# Altium PCB display.PcbDoc (part 1 of 2)
Units mil, origin at the board's own origin, x right, y up, seen from the top; angles counter-clockwise.
Board outline 6000 x 4000 mil, 2 copper layers (Top Layer, Bottom Layer); 69 components, 74 nets, 310 pads, 139 vias.
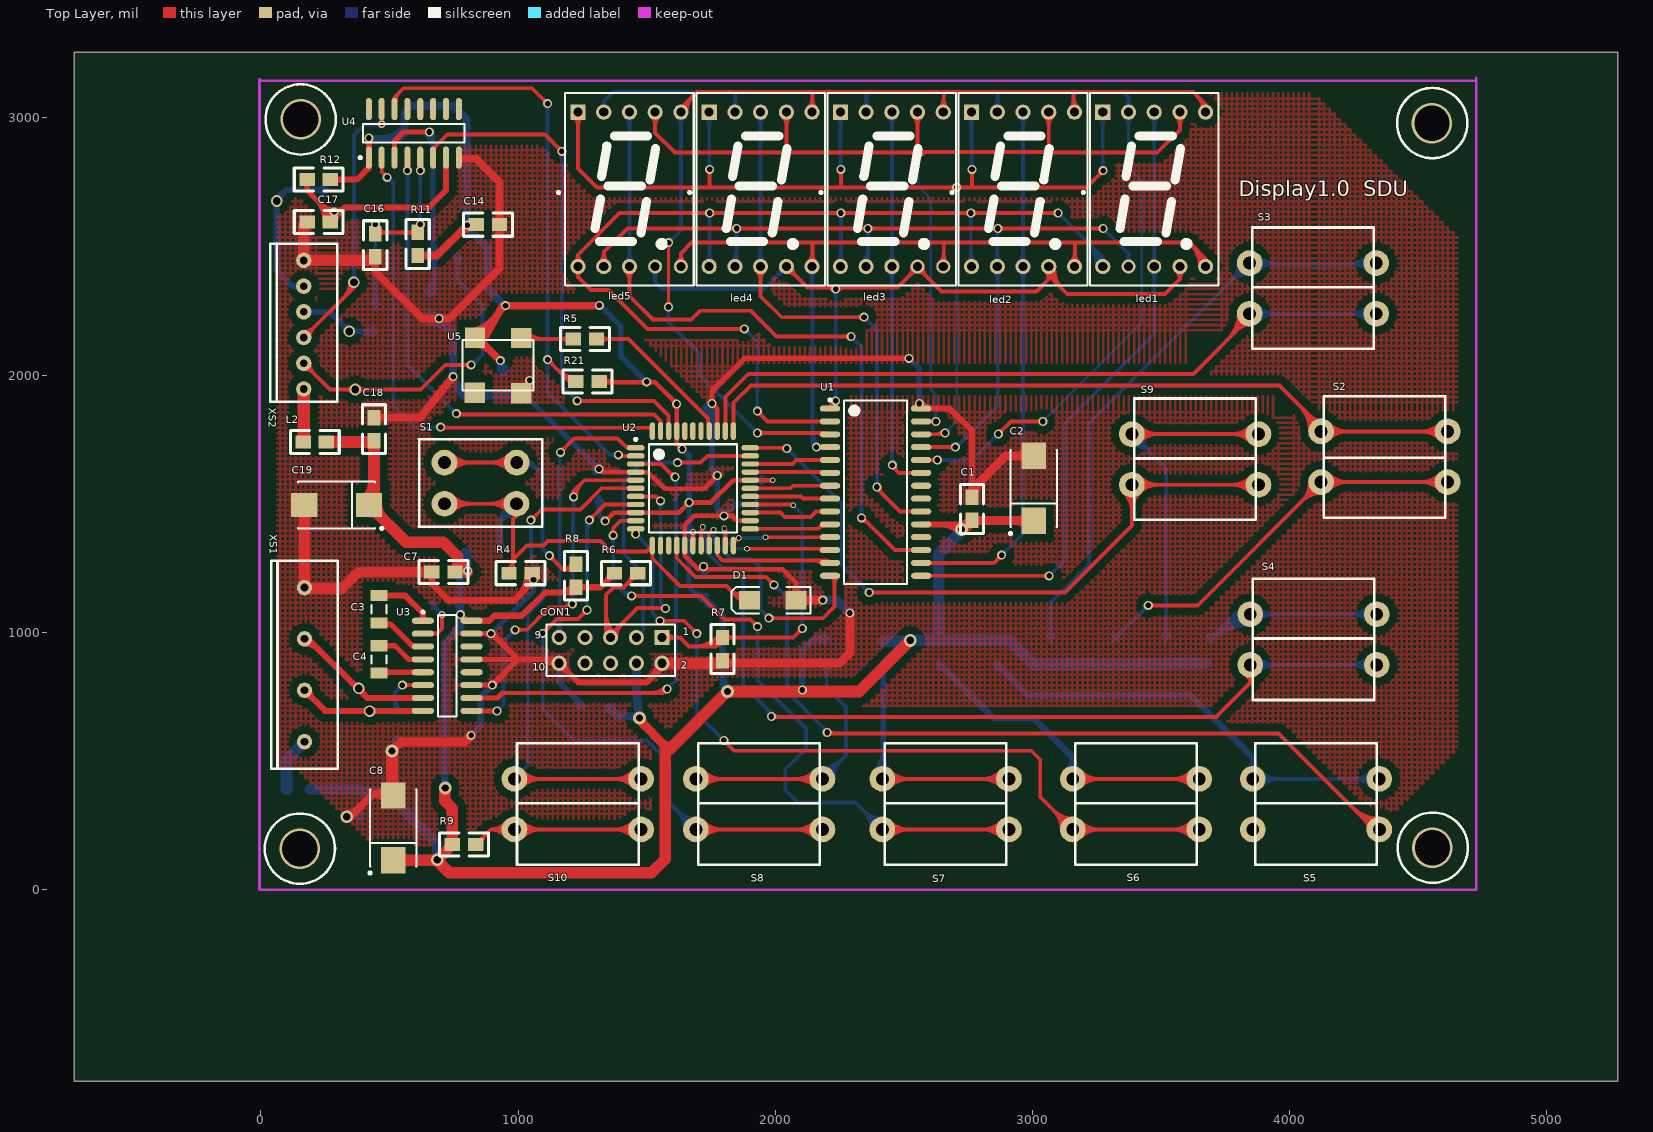
[diagram p0: Top Layer view]
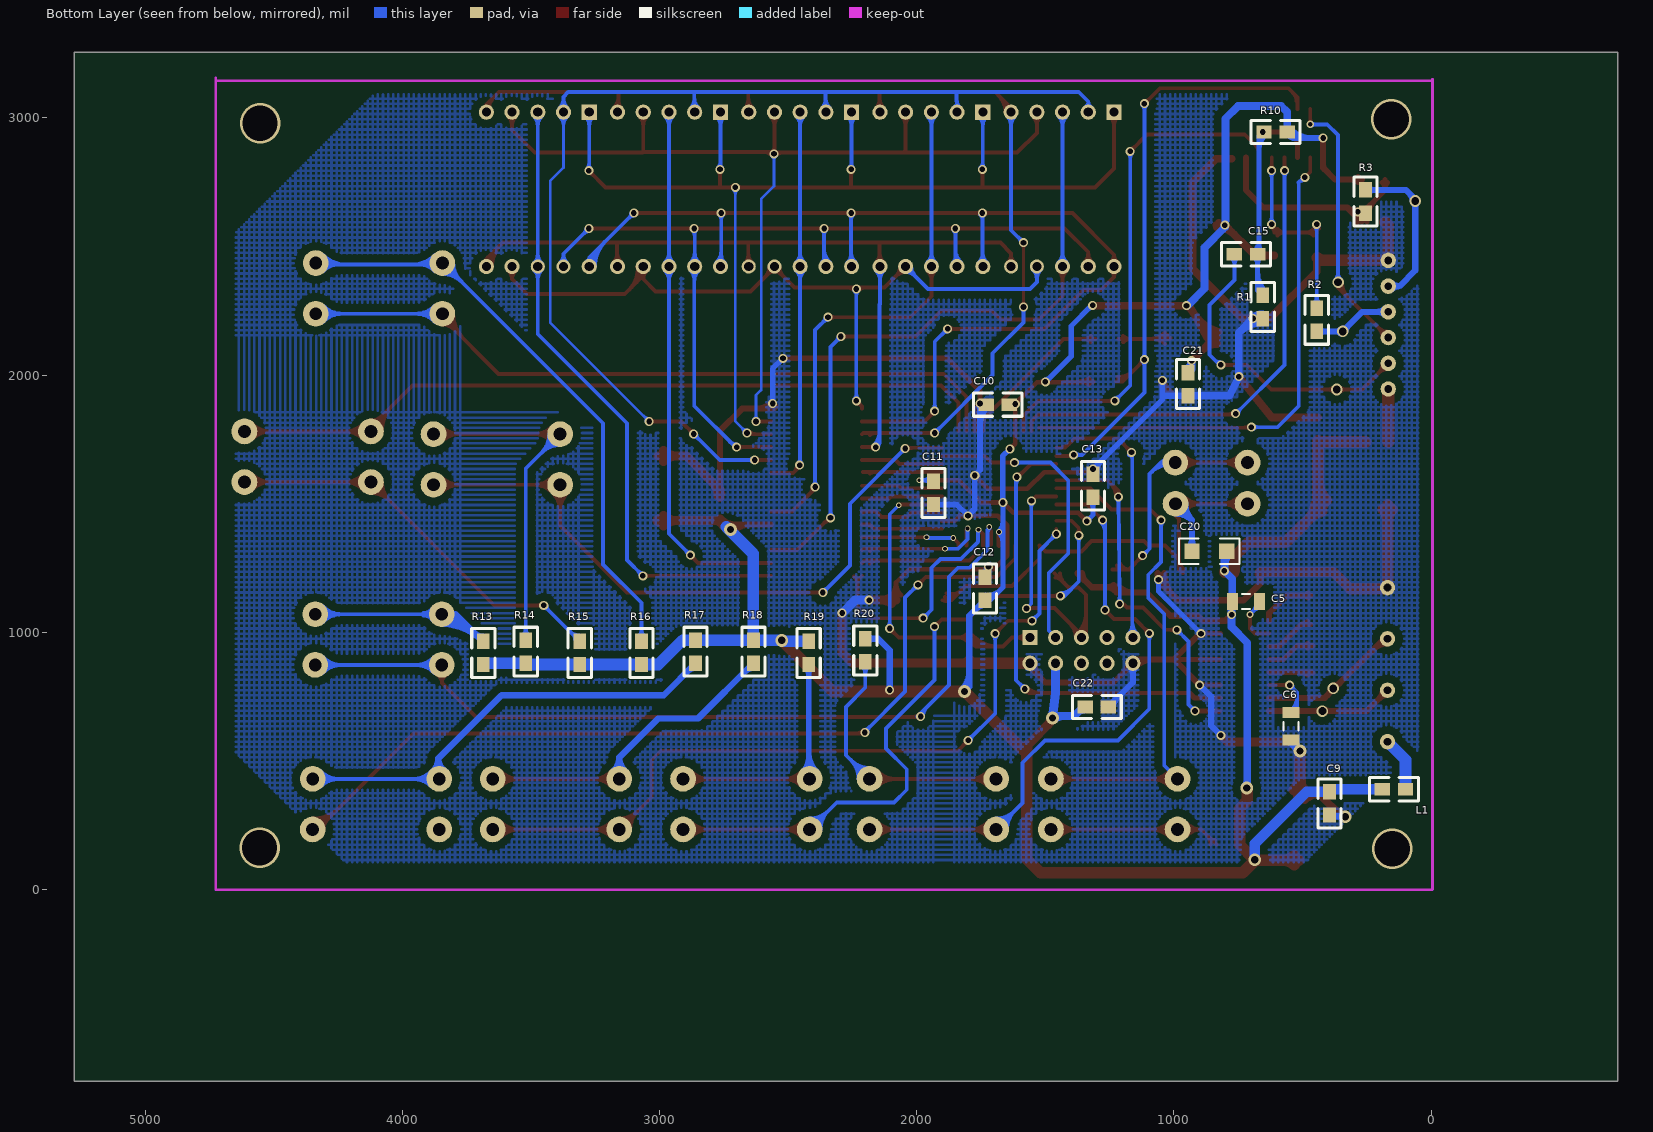
[diagram p1: Bottom Layer view, seen from below]

## Layer stack, top to bottom
Top Layer: signal copper 1.4
Dielectric: dielectric 12.6, FR-4, Dk 4.8
Bottom Layer: signal copper 1.4

## Board outline
-725,-745 5275,-745 5275,3255 -725,3255

## Design rules (kind name [scope] priority, off if disabled: settings)
Clearance [All] p1: gap=10
ComponentClearance [All] p1 off: gap=10 collisioncheckmode=3 verticalgap=10 showdistances=FALSE
Height [All] p1 off: minheight=0 maxheight=1000 prefheight=500
PlaneClearance [All] p1: clearance=40
PlaneConnect [All] p1: planeconnectstyle=Direct reliefexpansion=20 reliefentries=4 reliefconductorwidth=10 reliefairgap=10
PolygonConnect [All] p1: connectstyle=Direct reliefconductorwidth=10 reliefentries=4 polygonreliefangle="90 Angle"
RoutingVias [All] p1: holewidth=22 width=35 viastyle="Through Hole" minholewidth=22 minwidth=35 maxholewidth=22 maxwidth=35
SilkscreenOverComponentPads [IsPad] p1: minsilkscreentomaskgap=10
SolderMaskExpansion [All] p1: expansion=4
Width [All] p1: maxlimit=50 minlimit=10 preferedwidth=15
23 further rules are at their usual default settings.

## Components (designator, comment, footprint, x,y, rotation, side; value= is the part's Value field where it differs from the comment)
C1 "Cap" 0805 2765,1525 r270 top
C2 "22uF" 7343 3005,1560 r90 top
C3 "10uF" C1206 460,1090 r270 top
C4 "22uF" C1206 460,895 r270 top
C5 "10uF" C1206 720,1120 r180 bottom
C6 "10uF" C1206 545,635 r90 bottom
C7 "Cap" 0805 665,1235 r0 top
C8 "22uF" 7343 515,240 r90 top
C9 "Cap" 0805 395,290 r90 bottom
C10 "Cap" 0805 1730,1885 r180 bottom
C11 "Cap" 0805 1935,1497.01 r90 bottom
C12 "Cap" 0805 1735,1215 r270 bottom
C13 "Cap" 0805 1315,1615 r270 bottom
C14 "Cap" 0805 928,2585 r180 top
C15 "Cap" 0805 655,2220 r90 bottom
C16 "Cap" 0805 445,2460 r90 top
C17 "Cap" 0805 180,2595 r0 top
C18 "Cap" 0805 440,1835 r270 top
C19 "22uF" 7343 295,1495 r180 top
C20 "Cap" 1206 795,1315 r0 bottom
C21 "Cap" 0805 945,1920 r90 bottom
C22 "Cap" 0805 1255,710 r0 bottom
CON1 "jtag" HDR2X5 1560,980 r180 top
D1 "LL4148" DO214 1990,1125 r180 top
L1 "ferrite bead" 0805 190,390 r180 bottom
L2 "ferrite bead" 0805 255,1740 r180 top
led1 "8seg 10pin" LEDsum#1 3420,2545 r0 top
led2 "8seg 10pin" LEDsum#2 2910,2545 r0 top
led3 "8seg 10pin" LEDsum#3 2400,2545 r0 top
led4 "8seg 10pin" LEDsum#2 1890,2545 r0 top
led5 "8seg 10pin" LEDsum#3 1380,2545 r0 top
R1 "300R" 0805 675,2470 r0 bottom
R2 "300R" 0805 445,2260 r270 bottom
R3 "300R" 0805 255,2630 r90 bottom
R4 "10k" 0805 1055,1230 r180 top
R5 "22R" 0805 1305,2140 r180 top
R6 "4.7k" 0805 1375,1230 r0 top
R7 "1k" 0805 1795,980 r270 top
R8 "1k" 0805 1225,1265 r270 top
R9 "10k" 0805 745,175 r0 top
R10 "10K(beiyong)" 0805 650,2945 r180 bottom
R11 "10K" 0805 610,2555 r270 top
R12 "10K" 0805 180,2760 r0 top
R13 "10K" 0805 3685,965 r270 bottom
R14 "10K" 0805 3520,970 r270 bottom
R15 "10K" 0805 3310,965 r270 bottom
R16 "10K" 0805 3070,965 r270 bottom
R17 "10K" 0805 2860,880 r90 bottom
R18 "10K" 0805 2635,880 r90 bottom
R19 "10K" 0805 2420,875 r90 bottom
R20 "10K" 0805 2200,885 r90 bottom
R21 "10K(beiyong)" 0805 1225,1975 r0 top
S1 "SW-PB" reset 995,1500 r90 top
S2 "SW-PB" B3F4050 4535,1860 r270 top
S3 "SW-PB" B3F4050 3923,2160 r90 top
S4 "SW-PB" B3F4050 3925,795 r90 top
S5 "SW-PB" B3F4050 3935,155 r90 top
S6 "SW-PB" B3F4050 3235,155 r90 top
S7 "SW-PB" B3F4050 2495,155 r90 top
S8 "SW-PB" B3F4050 1770,155 r90 top
S9 "SW-PB" B3F4050 3465,1495 r90 top
S10 "SW-PB" B3F4050 1065,155 r90 top
U1 "ICM7228AIBIZ" SO28_L 2390,1545 r0 top
U2 "EPM7064AETC44-10" TQFP44_N 1680,1560 r0 top
U3 "MAX232ESE" NSO16_N 725,870 r0 top
U4 "cd4049UBD" L16_N 595,2940 r90 top
U5 "有源晶振" smd7050 1060,1940 r90 top
XS1 "CON4" 2SIP4 170,575 r90 top
XS2 "xs2" SIP6 90,2100 r90 top

## Footprints (in the part's own frame and the unit in brackets; to place one, negate y for a bottom-side part, rotate by r counter-clockwise, add the part's x,y. Pads: shape width x height; smd on the part's side, far side on the other; paste and mask are expansions set on the pad)
2SIP4 [mil]
  round 60 hole 30: 1(0,0) 2(200,0) 3(400,0) 4(599,0)
  silkscreen extent -105,-130 704,130
0805 [mil]
  rect 60x50 smd: 1(0,0) 2(90,0)
  silkscreen extent -50,-45 140,45
1206 [mil]
  rect 60x60 smd: 1(0,0) 2(135,0)
  silkscreen extent -50,-50 185,50
7343 [mm] "Capacitor, SM Tantalum; Body 7.3 x 4.3 mm (LxW typ)"
  rect 2.6x2.4 smd: 1(-3.2,0) 2(3.2,0)
  silkscreen extent -4.57,-2.3 3.8,2.42
B3F4050 [mm]
  round 2.54 hole 1.27: 1(2,2) 1(2,-10.5) 2(7,2) 2(7,-10.497)
  silkscreen extent -1.47,-10.25 10.52,1.75
C1206 [mm] "Chip Capacitor, Body 3.2x1.6mm, IPC High Density"
  rect 1.1x1.7 smd: 1(-1.35,0) 2(1.35,0)
  silkscreen extent -0.4,-0.75 0.4,0.75, body extent -1.7,-0.9 1.7,0.9, height 1.3
DO214 [mm] "DO-214-AC/SMA; 2 C-Bend Leads; Body 5.3 x 2.6 mm, inc. leads (LxW)"
  rect 2.1x1.85 smd: 1(-2.3,0) 2(2.3,0)
  silkscreen extent -3.75,-1.33 4.05,1.33
HDR2X5 [mm] "Connector; Header; 5x2 Position"
  rect 1.5x1.5 hole 0.9: 1(0,0)
  round 1.5 hole 0.9: 2(0,2.54) 3(2.54,0) 4(2.54,2.54) 5(5.08,0) 6(5.08,2.54) 7(7.62,0) 8(7.62,2.54) 9(10.16,0) 10(10.16,2.54)
  silkscreen extent -1.27,-1.27 11.43,3.81
L16_N [mm] "SOIC, 16-Leads, Body 9.9x3.9mm, Pitch 1.27mm, IPC Medium Density"
  oval 2.2x0.6 smd: 1(-2.4,4.445) 2(-2.4,3.175) 3(-2.4,1.905) 4(-2.4,0.635) 5(-2.4,-0.635) 6(-2.4,-1.905) 7(-2.4,-3.175) 8(-2.4,-4.445) 9(2.4,-4.445) 10(2.4,-3.175) 11(2.4,-1.905) 12(2.4,-0.635) 13(2.4,0.635) 14(2.4,1.905) 15(2.4,3.175) 16(2.4,4.445)
  silkscreen extent -2.52,-5 0.9,5.42, body extent -1.95,-4.95 1.95,4.95, height 1.75
LEDsum#1 [mm]
  round 1.5 hole 0.9: a(3.89,12.12) AT(1.35,12.12) b(6.43,12.12) c(3.89,-3.12) DP(6.43,-3.12) e(-3.73,-3.12) f(-1.19,12.12)
  round 1.397 hole 0.9: AT(1.35,-3.12) d(-1.19,-3.12)
  rect 1.5x1.5 hole 0.9: g(-3.73,12.12)
  silkscreen extent -5.77,-5 7.7,14
LEDsum#2 [mm]
  round 1.5 hole 0.9: a(3.89,12.12) AT(1.35,-3.12) AT(1.35,12.12) b(6.43,12.12) c(3.89,-3.12) d(-1.19,-3.12) DP(6.43,-3.12) e(-3.73,-3.12) f(-1.19,12.12)
  rect 1.5x1.5 hole 0.9: g(-3.73,12.12)
  silkscreen extent -5.77,-5 7.7,14
LEDsum#3 [mm]
  round 1.5 hole 0.9: a(3.89,12.12) AT(1.35,-3.12) AT(1.35,12.12) b(6.43,12.12) d(-1.19,-3.12) e(-3.73,-3.12) f(-1.19,12.12)
  round 1.397 hole 0.9: c(3.89,-3.12) DP(6.43,-3.12)
  rect 1.5x1.5 hole 0.9: g(-3.73,12.12)
  silkscreen extent -5.77,-5 7.7,14
NSO16_N [mm] "SOIC, 16-Leads, Body 9.9x3.9mm, Pitch 1.27mm, IPC Medium Density"
  oval 2.2x0.6 smd: 1(-2.4,4.445) 2(-2.4,3.175) 3(-2.4,1.905) 4(-2.4,0.635) 5(-2.4,-0.635) 6(-2.4,-1.905) 7(-2.4,-3.175) 8(-2.4,-4.445) 9(2.4,-4.445) 10(2.4,-3.175) 11(2.4,-1.905) 12(2.4,-0.635) 13(2.4,0.635) 14(2.4,1.905) 15(2.4,3.175) 16(2.4,4.445)
  silkscreen extent -2.52,-5 0.9,5.42, body extent -2,-5 2,5, height 1.75
reset [mil]
  round 100 hole 50: 1(0,281) 1(0,1) 2(160,281) 2(160,0)
  silkscreen extent -90,-100 251,380
SIP6 [mil]
  round 60 hole 30: 1(-154,-77) 2(-54,-77) 3(46,-77) 4(146,-77) 5(246,-77) 6(346,-77)
  silkscreen extent -204,-207 410,53
smd7050 [mil]
  rect 78.74x78.74 smd: 1(-9,228) 2(-10,47) 3(204,47) 4(205,227)
  silkscreen extent 0,0 197,276
SO28_L [mm] "SOIC, 28-Leads, Body 17.9x7.5mm, Pitch 1.27mm, IPC High Density"
  oval 2x0.6 smd: 1(-4.5,8.255) 2(-4.5,6.985) 3(-4.5,5.715) 4(-4.5,4.445) 5(-4.5,3.175) 6(-4.5,1.905) 7(-4.5,0.635) 8(-4.5,-0.635) 9(-4.5,-1.905) 10(-4.5,-3.175) 11(-4.5,-4.445) 12(-4.5,-5.715) 13(-4.5,-6.985) 14(-4.5,-8.255) 15(4.5,-8.255) 16(4.5,-6.985) 17(4.5,-5.715) 18(4.5,-4.445) 19(4.5,-3.175) 20(4.5,-1.905) 21(4.5,-0.635) 22(4.5,0.635) 23(4.5,1.905) 24(4.5,3.175) 25(4.5,4.445) 26(4.5,5.715) 27(4.5,6.985) 28(4.5,8.255)
  silkscreen extent -4.62,-9.05 3.1,9.23, body extent -3.8,-9.06 3.8,9.06, height 2.65
TQFP44_N [mm] "Thin QFP, 44-Leads, Body 10x10mm, Pitch 0.8mm, IPC Medium Density"
  oval 1.75x0.55 smd: 1(-5.65,4) 4(-5.65,1.6) 6(-5.65,0) 9(-5.65,-2.4) 11(-5.65,-4) 23(5.65,-4)
  oval 1.75x0.533 smd: 2(-5.65,3.2) 3(-5.65,2.4) 5(-5.65,0.8) 7(-5.65,-0.8) 8(-5.65,-1.6) 10(-5.65,-3.2) 24(5.65,-3.2) 25(5.65,-2.4) 26(5.65,-1.6) 27(5.65,-0.8) 28(5.65,0) 29(5.65,0.8) 30(5.65,1.6) 31(5.65,2.4) 32(5.65,3.2) 33(5.65,4)
  oval 0.55x1.75 smd: 12(-4,-5.65) 14(-2.4,-5.65) 16(-0.8,-5.65) 18(0.8,-5.65) 20(2.4,-5.65) 22(4,-5.65) 34(4,5.65) 39(0,5.65) 40(-0.8,5.65)
  oval 0.533x1.75 smd: 13(-3.2,-5.65) 15(-1.6,-5.65) 17(0,-5.65) 19(1.6,-5.65) 21(3.2,-5.65) 35(3.2,5.65) 36(2.4,5.65) 37(1.6,5.65) 38(0.8,5.65) 41(-1.6,5.65) 42(-2.4,5.65) 43(-3.2,5.65)
  oval 0.533x1.727 smd: 44(-4,5.65)
  silkscreen extent -5.77,-4.35 4.35,4.95, body extent -5,-5 5,5, height 1.2

## Part data
C1 C7 C9 C10 C11 C12 C13 C14 C15 C16 C17 C18 C20 C21 C22: "Capacitor"
C2 C3 C4 C5 C6 C8 C19: library part "Cap Pol2", "Polarized Capacitor (Axial)"
D1: library part "Diode 1N4148", "High Conductance Fast Diode"
L1 L2: library part INDUCTOR
R1 R2 R3 R4 R5 R6 R7 R8 R9 R10 R11 R12 R13 R14 R15 R16 R17 R18 R19 R20 R21: library part RES2
S1 S2 S3 S4 S5 S6 S7 S8 S9 S10: "Switch"
U1: library part ICM7218
U2: "MAX 7000AE 3.3V CPLD, 64 Macrocells, 44-Pin TQFP, Speed Grade 10, Commercial Grade"
U3: library part MAX232, "DUAL EIA-232 DRIVER/RECEIVER"
U4: library part cd4049
U5: library part jingzhen
XS1: "Connector"
XS2: library part xs6

## Via types
v1: diameter 35, hole 22, Top Layer to Bottom Layer, 110 vias
v2: diameter 22, hole 15, Top Layer to Bottom Layer, 9 vias
v3: diameter 50, hole 28, Top Layer to Bottom Layer, 8 vias
v4: diameter 45, hole 30, Top Layer to Bottom Layer, 6 vias
v5: diameter 157.48, hole 137.8, Top Layer to Bottom Layer, 4 vias
v6: diameter 28, hole 15, Top Layer to Bottom Layer, 1 vias
v7: diameter 30, hole 18, Top Layer to Bottom Layer, 1 vias

## Nets (pads, with @x,y where several pads share a name; then routed paths per layer and width w, separated by ;. In a path a pad name is that pad's centre, name@x,y a point inside that pad or via, vN(x,y) a via of type N, cw(c..) or ccw(c..) an arc to the next point about the centre after c; other vN are vias at no path point)
+5V: C1.2 C2.1 C5.1 C7.2 C8.1 C9.2 C10.2 C11.2 C12.2 C13.2 C14.2 C18.2 C19.1 C20.1 C21.2 C22.2 CON1.4 L1.1 L2.1 R6.1 R8.2 R9.1 R10.2 R11.2 R12.2 R13.2 R14.2 R15.2 R16.2 R17.2 R18.2 R19.2 R20.2 R21.2 U1.19 U2.9 U2.17 U2.29 U2.41 U3.16 U4.1 U5.4 | length 17046.1
  Top Layer w18: v1(1339,1432) 1372.51,1465.51 U2.9@1457.56,1465.51 1521,1465.51 ; v1@1339,1440.5 ccw(c1339,1461.02) 1353.51,1446.51 ccw(c1368.02,1432) v1@1347.5,1432 ; 1367.5,1972.5 1532.5,1972.5 v1(1617.01,1887.99) U2.41@1617.01,1782.44 1617,1734 v1(1638.01,1712.99) ; 1475.86,1972.5 ccw(c1475.86,1998.14) v1@1493.99,1980.01 ; v1@1506.01,1980.01 ccw(c1524.14,1998.14) 1524.14,1972.5 ; 1525,1465.51 1625.51,1465.51 v1(1665,1505) 1750,1505 1836.5,1591.5 U2.29@1902.44,1591.5 v2(1990.5,1591.5) ; v1@1608.51,1887.99 ccw(c1587.99,1887.99) 1602.5,1902.5 ccw(c1617.01,1917.01) v1@1617.01,1896.49 ; v1@1611,1881.98 cw(c1596.49,1867.47) 1617.01,1867.47 cw(c1637.53,1867.47) v1@1623.02,1881.98 ; v1@1656.5,1505 cw(c1635.98,1505) 1650.49,1490.49 cw(c1665,1475.98) v1@1665,1496.5 ; v1@1671.01,1498.99 cw(c1685.52,1484.48) 1685.52,1505 cw(c1685.52,1525.52) v1@1671.01,1511.01 ; U2.17@1680,1337.56 v2(1680,1390)
  Top Layer w21: R21.2@1315,1975 1365,1975 ; R21.2@1330.25,1964.75 cw(c1355.01,1939.99) 1355.01,1975 cw(c1355.01,2010.01) R21.2@1330.25,1985.25
  Top Layer w23.62: R12.2@270,2760 374,2760 420,2806 U4.1@420,2845.51 v1(420,2922) ; R12.2@284.33,2750.67 cw(c306.84,2728.16) 306.84,2760 cw(c306.84,2791.84) R12.2@284.33,2769.33 ; 414.33,2800.33 ccw(c400.65,2814.02) U4.1@420,2814.02 ; v1(776,1069) 800,1045 U3.16@819.49,1045 888,1045 907.49,1064.49 1014.49,1064.49 1105,1155 R8.2@1223,1155 ; v1@779.5,1065.5 cw(c759,1045) U3.16@787.99,1045 ; v1(802,2583) v1@804,2585 ; C14.2@836,2585 C14.2@838,2585 ; 1156.95,1155 ccw(c1156.95,1238.05) R8.2@1215.67,1179.33 ; U1.19@2567.17,1420 C1.2@2740,1420 ; 2643.87,1420 cw(c2643.87,1319.87) v3@2714.67,1390.67 ; 2700.9,1420 cw(c2700.9,1376.9) v3@2731.38,1407.38 ; 2709.02,1420 ccw(c2709.02,1485.98) C1.2@2755.67,1439.33
  Top Layer w25: R8.2@1225,1175 1320,1175 R6.1@1375,1230 ; R8.2@1233.84,1166.16 cw(c1255.18,1144.82) 1255.18,1175 cw(c1255.18,1205.18) R8.2@1233.84,1183.84 ; 1345.13,1200.13 ccw(c1315.25,1230) R6.1@1357.5,1230
  Top Layer w30: R11.2@610,2465 684,2465 v1(802,2583) C14.2@836,2583 ; 766.42,2547.42 cw(c833,2480.85) C14.2@833,2575 ; 787.5,2568.5 cw(c813.49,2542.51) C14.2@828.83,2575.91 ; v1@804.03,2583 ccw(c804.03,2613.97) C14.2@825.93,2592.07 ; U5.4@826.53,2168.49 ccw(c781.72,2331.11) 928.39,2247.81 ; U5.4@833,2120.63 cw(c833,2040.07) 889.97,2097.03 ; U5.4@833,2145 U5.4@842,2145 ; U5.4@834.5,2139.57 ccw(c808.93,2232.37) 892.62,2184.83 ; U5.4@857.37,2145 ccw(c894.48,2145) U5.4@868.24,2118.76 ; 930.09,2250.79 cw(c961.15,2233.15) v1@951.66,2267.59 ; v1(931,2056) U5.4@842,2145 ; v1@941,2270 870,2145 U5.4@842,2145 ; v1(951,2270) v1@1311,2270
  Top Layer w35: C7.2@765,1239 v1(804,1239) ; C7.2@765.3,1229.7 cw(c787.76,1207.24) v1@787.76,1239 ; v3@1471,660 1573,558 ; v3@1479.5,667 ccw(c1516.92,667) 1490.46,640.54 ; C1.2@2765,1435 C2.1@3004.02,1435 ; 2930.82,1435 cw(c2930.82,1359.83) C2.1@2983.97,1412.98 ; 2935.57,1435 ccw(c2935.57,1503.45) C2.1@2983.97,1455.05
  Top Layer w45: L2.1@255,1740 C18.2@435,1740 ; C19.1@407.42,1512.5 ccw(c328.78,1591.14) 440,1591.14 ; C19.1@424.92,1470.26 cw(c424.92,1420.02) C19.1@460.44,1455.54 ; C18.2@440,1745 440,1514.02 C19.1@420.98,1495 565.98,1350 710,1350 765,1295 ; C19.1@449.67,1495 ccw(c518.91,1495) 469.95,1446.04 ; C8.1@515,114.02 684.02,114.02 733.03,65 1519,65 1573,119 1573,558 ; C8.1@532.5,96.52 cw(c574.74,54.28) 574.74,114.02 cw(c574.74,173.75) C8.1@532.5,131.51 ; v3(686,116) R9.1@745,175 745,315 715,345 v3@715,395 ; C7.2@765,1239 765,1295 ; v1@801.69,1234.56 cw(c833.11,1295) 765,1295 ; 1587.5,543.5 v3(1814,770) 2326,770 v3(2525,969) ; C1.2@2740,1410 C1.2@2765,1435 ; C2.1@3004.02,1435 C2.1@3005,1434.02
  Bottom Layer w18: C13.2@1303.69,1508.69 cw(c1276.37,1481.37) 1315,1481.37 cw(c1353.63,1481.37) C13.2@1326.31,1508.69 ; C13.2@1315,1525 1315,1456 v1(1339,1432) ; v1@1330.5,1432 ccw(c1309.98,1432) 1324.49,1446.51 ccw(c1339,1461.02) v1@1339,1440.5 ; C11.2@1939.49,1591.5 v2(1990.5,1591.5) ; C11.2@1946.31,1580.69 cw(c1972.39,1554.62) 1972.39,1591.5 ; C11.2@1946.31,1603.32 ccw(c1974.86,1631.87) 1974.86,1591.5
  Bottom Layer w20: v1@1659.7,1499.7 cw(c1646.89,1486.89) 1665,1486.89 cw(c1683.11,1486.89) v1@1670.3,1499.7 ; 1665,1351.37 cw(c1718.63,1351.37) v2@1680.71,1389.29 ; 1665,1390 1665,1175 1715,1125 C12.2@1735,1125 ; 1665,1395 v1(1665,1505) ; 1665,1399.66 cw(c1670.34,1399.66) 1666.56,1403.44 ; 1665,1428.63 ccw(c1718.63,1428.63) v2@1680.71,1390.71 ; 1677.5,1162.5 ccw(c1722.26,1207.26) C12.2@1732.56,1144.8 ; 1705.04,1134.96 ccw(c1730.06,1159.97) C12.2@1735.81,1125.07
  Bottom Layer w21: v1@1316,2264 cw(c1316,2239.86) 1333.07,2256.93 ; v1@1318,2272 1400,2190 1400,2073 v1@1499,1974 ; 1486.34,1986.66 ccw(c1500,2000.31) v1@1500,1981 ; v1(1638.01,1712.99) 1666,1685 1666,1623 v1(1665,1505)
  Bottom Layer w23.62: v1(420,2922) 537,2922 R10.2@560,2945 ; 467.63,2922 ccw(c467.63,3032.37) R10.2@545.67,2954.33 ; 524.66,2922 ccw(c524.66,2975.34) R10.2@562.38,2937.62
  Bottom Layer w25: C12.2@1735,1107.5 cw(c1735,1065.25) 1764.87,1095.13 ; C12.2@1735,1125 1796,1064 1796,788 v3(1814,770) ; 1796,843.63 ccw(c1887.63,843.63) v3@1822.84,778.84 ; v1(2105,776) 2105,930 2150,975 R20.2@2200,975 ; R20.2@2191.16,966.16 ccw(c2169.82,944.82) 2169.82,975 ccw(c2169.82,1005.18) R20.2@2191.16,983.84
  Bottom Layer w30: C9.2@385,390 C9.2@395,380 ; R10.2@560,2945 560,3023 583,3046 751,3046 800,2997 v1@800,2600 ; v3@715,415 715,960 776,1021 v1(776,1069) 776,1117.15 C5.1@773.15,1120 773.15,1208.15 v1(804,1239) 804,1306 C20.1@795,1315 ; 715,423.97 ccw(c745.97,423.97) v3@724.07,402.07 ; C5.1@768.44,1103.48 cw(c750.21,1085.24) v1@776,1085.24 ; C20.1@784.39,1304.39 cw(c737.06,1257.06) 804,1257.06 ; v1@802,2575 881,2496 881,2337 v1@949.5,2268.5 ; v1@804.5,2583 ccw(c829.85,2583) 811.92,2565.08 ; C21.2@945,2010 931,2024 v1(931,2056) ccw(c968.02,2056) C21.2@949.9,2023.72 ; C22.2@1350,700 cw(c1350,668.62) C22.2@1372.19,690.81 ; C22.2@1354,709 1388,675 v3@1463,675 ; 1428.54,675 cw(c1428.54,623.54) v3@1464.93,659.93
  Bottom Layer w35: 1460,775 CON1.4@1460,880 ; 1461,764 v3@1471,685
  Bottom Layer w40: L1.1@190,390 C9.2@385,390 ; C9.2@395,380 484,380 686,178 v3(686,116)
  Bottom Layer w45: R19.2@2420,965 v3@2510,965 ; v3(2525,969) 2634,969 R18.2@2635,970 ; v3@2740,1410 2635,1305 R18.2@2635,970 ; R13.2@3672,880 R14.2@3520,880 3515,875 R15.2@3310,875 R16.2@3070,875 3005,875 2910,970 R17.2@2860,970 R18.2@2635,970
  other v1: 1500,1974 1316,2271
  other v3: 717,395 1472,667 2724,1400
BACKWARD: S8.1 U2.8 | length 3456.3
  Top Layer w15: v1(1096,996) 1152,1052 1233,1052 1258,1077 v1@1258,1088 ; v1@1096,1006 ccw(c1096,1030.14) 1113.07,1013.07 ccw(c1130.14,996) v1@1106,996 ; v1@1258,1087 cw(c1233.86,1087) 1250.93,1069.93 cw(c1268,1052.86) v1@1268,1077 ; v1(1277,1436) 1338.01,1497.01 U2.8@1457.56,1497.01 U2.8@1457.01,1497.01 ; v1@1277,1446 ccw(c1277,1470.14) 1294.07,1453.07 ccw(c1311.14,1436) v1@1287,1436 ; S8.1@1691.26,233.74 S8.1@2183.39,233.74 ; S8.1@1710.71,214.29 cw(c1757.65,167.35) 1757.65,233.74 cw(c1757.65,300.13) S8.1@1710.71,253.19 ; S8.1@1721.31,203.69 cw(c1793.86,131.14) 1793.86,233.74 cw(c1793.86,336.34) S8.1@1721.31,263.79 ; S8.1@2153.33,203.69 ccw(c2080.78,131.14) 2080.78,233.74 ccw(c2080.78,336.34) S8.1@2153.33,263.79 ; S8.1@2163.94,214.29 ccw(c2116.99,167.35) 2116.99,233.74 ccw(c2116.99,300.13) S8.1@2163.94,253.19
  Bottom Layer w15: v1@1088.93,988.93 cw(c1071.86,971.86) 1096,971.86 cw(c1120.14,971.86) v1@1103.07,988.93 ; v1(1096,996) 1096,702 1218,580 1502,580 1589,493 1589,336 S8.1@1691.26,233.74 ; v1@1260.93,1094.07 ccw(c1243.86,1111.14) 1268,1111.14 ccw(c1292.14,1111.14) v1@1275.07,1094.07 ; v1(1268,1087) v1@1268,1434 ; 1268,1390.13 cw(c1322.87,1390.13) v1@1284.07,1428.93 ; S8.1@1648.76,233.74 ccw(c1546.16,233.74) 1618.71,306.29 ccw(c1691.26,378.84) S8.1@1691.26,276.24 ; S8.1@1663.76,233.74 ccw(c1597.37,233.74) 1644.31,280.69 ccw(c1691.26,327.63) S8.1@1691.26,261.24
CS: U2.44 U4.2 | length 2135.9
  Top Layer w15: U4.2@470,2845.51 470,2790 v1(491,2769) ; v1(699.5,1797.5) 701.56,1795.44 U2.44@1524.52,1795.44 ; v1@706.57,1790.43 cw(c718.67,1778.33) 718.67,1795.44 ; v1@706.57,1804.57 ccw(c728.61,1826.61) 728.61,1795.44
  Bottom Layer w15: v1@491,2759 cw(c491,2722.79) 516.61,2748.39 ; v1(491,2769) 496,2769 515,2750 515,1880 597.5,1797.5 v1(699.5,1797.5) ; v1@692.43,1790.43 ccw(c675.36,1773.36) 675.36,1797.5 ccw(c675.36,1821.64) v1@692.43,1804.57
DOWN: S4.1 U2.18 | length 4158.7
  Top Layer w15: U2.18@1712,1341.06 1712,1395 v2@1718,1401 ; v1@1991,671 3713.52,671 3846.26,803.74 ; v1@1992.07,665.93 cw(c2004.31,653.69) 2004.31,671 ; v1@1992.07,680.07 ccw(c2013.97,701.97) 2013.97,671 ; S4.1@3826.65,836.03 cw(c3809.87,803.74) 3846.26,803.74 ; S4.1@3846.26,873.74 3846.26,803.74 ; S4.1@3865.87,836.03 ccw(c3882.65,803.74) 3846.26,803.74
  Bottom Layer w15: v2@1715.53,1407.53 cw(c1692.65,1384.65) 1725,1384.65 ; v2@1716.36,1406.91 cw(c1708.73,1392.54) 1725,1392.54 ; v2(1718,1410) 1718,1401 1725,1394 1725,1321 1795,1251 1840,1251 1875,1216 1875,795 1997,673 v1(1985,673) ; 1959.44,710.56 cw(c1921.89,673) v1@1975,673 ; S4.1@3846.26,873.74 S4.1@4338.39,873.74 ; S4.1@3865.71,854.29 cw(c3912.65,807.35) 3912.65,873.74 cw(c3912.65,940.13) S4.1@3865.71,893.19 ; S4.1@3876.31,843.69 cw(c3948.86,771.14) 3948.86,873.74 cw(c3948.86,976.34) S4.1@3876.31,903.79 ; S4.1@4308.33,843.69 ccw(c4235.78,771.14) 4235.78,873.74 ccw(c4235.78,976.34) S4.1@4308.33,903.79 ; S4.1@4318.94,854.29 ccw(c4271.99,807.35) 4271.99,873.74 ccw(c4271.99,940.13) S4.1@4318.94,893.19
ENTER: S5.1@4348.39,233.74 U2.15 | length 3883
  Top Layer w15: U2.15@1617.01,1337.56 1617.01,1287.99 1690,1215 1965,1215 v1(1995,1185) ; v1@1985,1185 ccw(c1960.86,1185) 1977.93,1202.07 ccw(c1995,1219.14) v1@1995,1195 ; v1@2202,607 3957,607 4330.26,233.74 S5.1@4348.39,233.74 ; v1(2202,611) v1@2204,611 ; v1@2209.07,618.07 ccw(c2235.8,644.8) 2235.8,607 ; 4244.89,319.11 ccw(c4348.39,422.6) S5.1@4348.39,276.24 ; 4270.5,293.5 ccw(c4348.39,371.39) S5.1@4348.39,261.24 ; 4288.65,275.35 cw(c4247.04,233.74) S5.1@4305.89,233.74 ; 4296.1,267.9 ccw(c4348.39,320.18) S5.1@4348.39,246.24
  Bottom Layer w15: v1@1995,1175 cw(c1995,1150.86) 2012.07,1167.93 cw(c2029.14,1185) v1@2005,1185 ; v1(1995,1185) 2045,1135 2045,770 v1@2204,611 ; 2183.51,631.49 cw(c2163.03,611) v1@2192,611 ; 2188.34,626.66 ccw(c2202,640.31) v1@2202,621
FORWARD: S10.2 U2.6 | length 2675.4
  Top Layer w15: S10.2@986.26,430.59 S10.2@1478.26,430.59 ; S10.2@1005.71,411.15 cw(c1052.65,364.2) 1052.65,430.59 cw(c1052.65,496.98) S10.2@1005.71,450.04 ; S10.2@1016.31,400.54 cw(c1088.86,327.99) 1088.86,430.59 cw(c1088.86,533.19) S10.2@1016.31,460.64 ; v1(1050,1436) 1092,1478 1243,1478 1325,1560 U2.6@1457.56,1560 ; v1@1050,1446 ccw(c1050,1470.14) 1067.07,1453.07 ccw(c1084.14,1436) v1@1060,1436 ; S10.2@1448.21,400.54 ccw(c1375.66,327.99) 1375.66,430.59 ccw(c1375.66,533.19) S10.2@1448.21,460.64 ; S10.2@1458.81,411.15 ccw(c1411.87,364.2) 1411.87,430.59 ccw(c1411.87,496.98) S10.2@1458.81,450.04
  Bottom Layer w15: S10.2@986.26,466.26 S10.2@986.26,430.59 1038,482.33 1038,1072 1100,1134 1100,1224 1050,1274 v1(1050,1436) ; v1@1042.93,1428.93 cw(c1025.86,1411.86) 1050,1411.86 cw(c1074.14,1411.86) v1@1057.07,1428.93 ; S10.2@1469.41,430.59 S10.2@1478.26,430.59
GND: C1.1 C2.2 C6.1 C7.1 C8.2 C9.1 C10.1 C11.1 C12.1 C13.1 C14.1 C15.1 C16.1 C17.1 C18.1 C19.2 C21.1 C22.1 CON1.2 CON1.10 D1.1 R4.1 R7.2 U1.28 U2.4 U2.16 U2.24 U2.36 U3.11 U3.13 U3.15 U4.8 U5.2 XS1.4 XS2.6 | length 14963.7
  Top Layer w18: v1@1317.5,1632.5 1327.01,1622.99 U2.4@1457.56,1622.99 1505.01,1622.99 1568,1560 ; 1570,1559 1724,1559 v1(1774.49,1609.49) ; v1(1754,1890) 1774.49,1869.51 U2.36@1774.49,1782.44 ; v1@1765.99,1609.49 cw(c1745.47,1609.49) 1759.98,1594.98 cw(c1774.49,1580.47) v1@1774.49,1600.99 ; v1@1794.99,1446.99 ccw(c1780.48,1432.48) 1780.48,1453 ccw(c1780.48,1473.52) v1@1794.99,1459.01 ; v1(1801,1453) 1685,1453 1648.5,1416.5 U2.16@1648.5,1337.56 1648.5,1297.5 1701,1245 2029.45,1245 ; 1833,1453 1851.98,1434.02 U2.24@1902.44,1434.02 ; 2035,1239.45 2080.55,1193.9 D1.1@2080.55,1125 ; D1.1@2061.16,1144.39 ccw(c2014.36,1191.19) 2080.55,1191.19 ccw(c2146.74,1191.19) D1.1@2099.94,1144.39
  Top Layer w20: U3.11@819.49,795 v1(900,795) ; U3.13@819.49,895 1000,895 ; U3.15@819.49,995 v1(895,995) ; v1@889.7,989.7 ccw(c876.89,976.89) 876.89,995 ccw(c876.89,1013.11) v1@889.7,1000.3 ; v1@894.7,789.7 ccw(c881.89,776.89) 881.89,795 ccw(c881.89,813.11) v1@894.7,800.3
  Top Layer w21: v1(1754,1890) 1754,1939 ; v1(1801,1453) 1833,1453
  Top Layer w21.65: v3(334,283) v3@347,283 ; 1755,1940 1880,2065 v1(2520,2065) ; v1@2556.41,1893.59 cw(c2532.82,1870) U1.28@2566.18,1870 ; v1(2560,1890) 2567.17,1882.83 U1.28@2567.17,1870
  Top Layer w23.62: v1@895,989.31 cw(c895,963.51) 913.25,981.75 ; v1(900,795) 1000,895 ; v1@900,995 1000,895 ; 1081.02,895 cw(c1081.02,801.02) CON1.10@1147.47,867.47 ; CON1.10@1160,862.28 cw(c1160,819.51) 1190.24,849.76 cw(c1220.49,880) CON1.10@1177.72,880 ; 1519.15,824.15 ccw(c1463.3,880) CON1.2@1542.28,880 ; CON1.2@1560,865 1500,805 1235,805 CON1.10@1160,880 1145,895 1000,895 ; U1.28@2547.32,1877.32 ccw(c2564.99,1894.99) U1.28@2564.99,1870 ; v1@2564.02,1894.02 ccw(c2622.02,1952.02) 2622.02,1870 ; U1.28@2567.17,1870 2679,1870 2765,1784 2765,1555 ; C1.1@2755.67,1539.33 ccw(c2733.16,1561.84) 2765,1561.84 ccw(c2796.84,1561.84) C1.1@2774.33,1539.33
  Top Layer w25: C7.1@656.16,1226.16 cw(c634.82,1204.82) 665,1204.82 cw(c695.18,1204.82) C7.1@673.84,1226.16 ; C7.1@665,1235 665,1190 731,1124 984,1124 v1@1055,1195 ; 1004,1144 ccw(c922.91,1225.1) R4.1@1037.51,1229.52 ; 1044.46,1184.46 ccw(c1000.81,1228.1) R4.1@1062.49,1230.48 ; 1047.93,1187.93 ccw(c1030.86,1205) R4.1@1055,1205
  Top Layer w30: v3@334,293 ccw(c334,348.53) 373.26,309.26 ; v3@347,283 434.98,370.98 ; 439.72,370.98 ccw(c439.72,445.2) C8.2@492.2,392.72 ; C18.1@440,1835 620,1835 v1(748,1994) ; C16.1@445,2460 445,2402 627,2220 734,2220 928,2414 928,2750 836.5,2841.5 U4.8@775.5,2841.5 ; C8.2@492.12,347.2 ccw(c434.99,290.47) 434.99,370.98 ; C8.2@510,370.98 434.98,370.98 ; U5.2@1013,1930 1045,1962 v1(1045,1980) ; U5.2@1028,1945 ccw(c993.01,1980) v1@1042.5,1980
  Top Layer w35: v3(510,539) 545.5,574.5 792.5,574.5 v1(818,600) ; R7.2@1785,880 2250,880 2290,920 v1(2290,1075) ; R7.2@1800.3,890.3 ccw(c1825.18,915.18) 1825.18,880 ; D1.1@2080.55,1125 v1(2185,1125) ; D1.1@2098.85,1111.62 cw(c2131.14,1079.33) 2131.14,1125 cw(c2131.14,1170.67) D1.1@2098.85,1138.38 ; C1.1@2765,1525 2765,1555 2895.98,1685.98 C2.2@3005,1685.98 ; C1.1@2772.5,1530 cw(c2850.96,1530) 2795.48,1585.48 ; C2.2@2983.97,1664.95 ccw(c2933.19,1614.18) 2933.19,1685.98 ccw(c2933.19,1757.79) C2.2@2983.97,1707.02
  Top Layer w40: 314,1169 380,1235 C7.1@665,1235
  Top Layer w45: C19.2@151.52,1477.5 cw(c109.28,1435.26) 169.02,1435.26 cw(c228.75,1435.26) C19.2@186.51,1477.5 ; 167,2569.65 cw(c200.35,2569.65) C17.1@176.77,2593.23 ; C19.2@169.02,1495 169.02,1169 314,1169 ; XS1.4@175.3,1179.3 ccw(c200.18,1204.18) 200.18,1169 ; C17.1@180,2595 167,2582 XS2.6@167,2446 C16.1@431,2446 ; 417.24,2446 ccw(c417.24,2482.76) C16.1@443.23,2456.77 ; C8.2@497.5,387.42 ccw(c467.33,417.59) 510,417.59 ; 510,441.73 ccw(c586.81,441.73) C8.2@532.5,387.42 ; v3(510,539) 510,370.98 C8.2@515,365.98 ; CON1.2@1560,880 1785,880 R7.2@1795,890
  Bottom Layer w18: C13.1@1315,1630 C13.1@1317.5,1632.5 ; v1@1714.99,1249.99 cw(c1700.48,1235.48) 1721,1235.48 cw(c1741.52,1235.48) v1@1727.01,1249.99 ; C12.1@1735,1215 1721,1229 v1(1721,1256) ccw(c1741.6,1256) C12.1@1737.88,1235.74
  Bottom Layer w20: v1@895,1002.5 ccw(c895,1020.61) 907.8,1007.8 ccw(c920.61,995) v1@902.5,995 ; v1@897.5,997.5 1060,1160 v1(1060,1205) ; v1@1054.7,1199.7 cw(c1041.89,1186.89) 1060,1186.89 cw(c1078.11,1186.89) v1@1065.3,1199.7
  Bottom Layer w21.65: v3@344.02,272.98 cw(c375.46,241.54) C9.1@375.46,286 ; v3@344.02,293.02 ccw(c360.97,309.97) 360.97,286 ; v3@345,286 391,286 C9.1@395,290 ; v3@358.37,286 cw(c358.37,248.37) C9.1@384.98,274.98 ; 363.2,286 ccw(c363.2,316.8) C9.1@384.98,295.02 ; v1(1045,1980) 1045,1905 v1(1315,1635) ; 1280.2,1669.8 cw(c1230.4,1620) C13.1@1300.83,1620 ; C10.1@1724.98,1874.98 cw(c1654.91,1804.91) 1754,1804.91 ; C10.1@1740.29,1890.29 cw(c1707.19,1857.19) 1754,1857.19 ; v1(1754,1890) 1754,1631 v1@1775,1610 ; 1762.37,1622.63 cw(c1749.23,1609.49) v1@1767.82,1609.49 ; v1(1774.49,1609.49) 1774.49,1480.51 v1@1801.5,1453.5 ; 1788.9,1466.1 cw(c1775.8,1453) v1@1794.33,1453 ; v1(1801,1453) v1@1801.5,1453.5 ; C11.1@1924.98,1486.99 ccw(c1900.78,1462.79) 1900.78,1497.01 ccw(c1900.78,1531.22) C11.1@1924.98,1507.03 ; C11.1@1935,1497.01 1845.01,1497.01 v1@1801.5,1453.5 ; v1(2520,2065) 2560,2025 v1(2560,1890)
  Bottom Layer w23.62: v1(818,600) 855,637 855,750 v1(900,795) ; CON1.10@1147.47,867.47 cw(c1117.23,837.23) 1160,837.23 cw(c1202.77,837.23) CON1.10@1172.53,867.47 ; CON1.10@1160,880 1160,805 C22.1@1255,710 ; 1223.95,741.05 cw(c1192.9,710) C22.1@1236.81,710
  Bottom Layer w25: C21.1@945,1920 1042,1920 ; C21.1@953.84,1911.16 cw(c975.18,1889.82) 975.18,1920 cw(c975.18,1950.18) C21.1@953.84,1928.84
  Bottom Layer w30: C15.1@645.34,2232.51 cw(c661.96,2202.39) v1@686.29,2226.71 ; C15.1@655,2205 cw(c655,2077.05) 745.48,2167.52 ; C15.1@655,2235 cw(c655,2179.47) v1@694.26,2218.74 ; C15.1@659.83,2206.24 cw(c682.02,2166.02) 714.5,2198.5 ; v1(693,2220) 748,2165 v1(748,1994) 785,1920 C21.1@945,1920
  Bottom Layer w35: v3(510,539) 545,574 C6.1@545,581.85 ; v3@519.83,548.83 ccw(c495.33,573.33) C6.1@529.14,580.94 ; v1(2185,1125) 2240,1125 v1(2290,1075)
MOVL: S9.1 U2.33 | length 3563.8
  Top Layer w15: U2.33@1902.44,1717.48 2042.48,1717.48 v1(2044.96,1715) ; 2014.83,1717.48 cw(c2014.83,1684.87) v1@2037.89,1707.93 ; 2026.81,1717.48 ccw(c2026.81,1733.15) v1@2037.89,1722.07 ; v1(2365,1155) 3126,1155 3386.26,1415.26 S9.1@3386.26,1573.74 S9.1@3878.39,1573.74 ; v1@2372.07,1147.93 cw(c2389.14,1130.86) 2389.14,1155 cw(c2389.14,1179.14) v1@2372.07,1162.07 ; S9.1@3356.21,1543.69 cw(c3283.66,1471.14) 3386.26,1471.14 cw(c3488.86,1471.14) 3416.31,1543.69 cw(c3488.86,1471.14) 3488.86,1573.74 cw(c3488.86,1676.34) S9.1@3416.31,1603.79 ; S9.1@3366.81,1554.29 cw(c3319.87,1507.35) 3386.26,1507.35 cw(c3452.65,1507.35) 3405.71,1554.29 cw(c3452.65,1507.35) 3452.65,1573.74 cw(c3452.65,1640.13) S9.1@3405.71,1593.19 ; S9.1@3848.33,1543.69 ccw(c3775.78,1471.14) 3775.78,1573.74 ccw(c3775.78,1676.34) S9.1@3848.33,1603.79 ; S9.1@3858.94,1554.29 ccw(c3811.99,1507.35) 3811.99,1573.74 ccw(c3811.99,1640.13) S9.1@3858.94,1593.19
  Bottom Layer w15: v1@2044.96,1705 cw(c2044.96,1680.86) 2062.03,1697.93 cw(c2079.1,1715) v1@2054.96,1715 ; v1(2044.96,1715) 2259.96,1500 2259.96,1260.04 v1(2365,1155) ; v1@2355,1155 ccw(c2330.86,1155) 2347.93,1172.07 ccw(c2365,1189.14) v1@2365,1165
MOVR: S2.1 U2.34 | length 3831.2
  Top Layer w15: U2.34@1837.48,1782.44 1837.48,1892.48 1905,1960 3960,1960 4121.61,1798.39 S2.1@4121.61,1781.26 S2.1@4613.74,1781.26 ; 4036.95,1883.05 cw(c3935.16,1781.26) S2.1@4079.11,1781.26 ; 4062.56,1857.44 cw(c3986.38,1781.26) S2.1@4094.11,1781.26 ; 4078.3,1841.7 ccw(c4121.61,1885.02) S2.1@4121.61,1823.76 ; 4088.17,1831.83 cw(c4037.59,1781.26) S2.1@4109.11,1781.26 ; S2.1@4141.06,1761.81 cw(c4188.01,1714.87) 4188.01,1781.26 cw(c4188.01,1847.65) S2.1@4141.06,1800.71 ; S2.1@4151.67,1751.21 cw(c4224.22,1678.66) 4224.22,1781.26 cw(c4224.22,1883.86) S2.1@4151.67,1811.31 ; S2.1@4583.69,1751.21 ccw(c4511.14,1678.66) 4511.14,1781.26 ccw(c4511.14,1883.86) S2.1@4583.69,1811.31 ; S2.1@4594.29,1761.81 ccw(c4547.35,1714.87) 4547.35,1781.26 ccw(c4547.35,1847.65) S2.1@4594.29,1800.71
NetC3_1: C3.1 U3.1 | length 255.7
  Top Layer w23.62: C3.1@470,1143 562,1143 630.51,1074.49 U3.1@630.51,1045 ; C3.1@478.77,1136.19 cw(c495.21,1119.75) 495.21,1143 ; C3.1@478.77,1150.11 ccw(c495.93,1167.27) 495.93,1143
NetC3_2: C3.2 U3.3 | length 244.8
  Top Layer w20: C3.2@467,1031 505.85,1031 ; C3.2@481.29,1043.63 ccw(c505.85,1061.19) 505.85,1031 ; 583.69,953.16 ccw(c599.02,968.48) U3.3@599.02,946.81 ; U3.3@630.51,945 591.85,945 505.85,1031
NetC4_1: C4.1 U3.4 | length 236.7
  Top Layer w20: C4.1@460,948.15 521.85,948.15 575,895 U3.4@630.51,895 ; C4.1@480.05,939.91 cw(c499.95,920.02) 499.95,948.15 cw(c499.95,976.28) C4.1@480.05,956.39
NetC4_2: C4.2 U3.5 | length 202.4
  Top Layer w20: C4.2@460,841.85 463.15,845 U3.5@630.51,845 ; C4.2@480.05,833.61 cw(c507.55,806.11) 507.55,845
NetC5_2: C5.2 U3.2 | length 306.5
  Top Layer w15: U3.2@630.51,995 685,995 705,1015 v6(705,1070) ; v6@700.4,1065.4 cw(c689.31,1054.31) 705,1054.31 cw(c720.69,1054.31) v6@709.6,1065.4
  Bottom Layer w15: C5.2@666.85,1094.04 cw(c666.85,1059.96) 690.94,1084.06 ; C5.2@666.85,1120 666.85,1108.15 v6(705,1070) ; C5.2@681,1108.19 ccw(c715.27,1108.19) 691.04,1083.96 ; v6@698.5,1070 ccw(c682.81,1070) 693.9,1081.1 ccw(c705,1092.19) v6@705,1076.5
NetC6_2: C6.2 U3.6 | length 375.8
  Top Layer w15: v1(550,795) U3.6@630.51,795 ; v1@557.07,787.93 cw(c574.14,770.86) 574.14,795 cw(c574.14,819.14) v1@557.07,802.07
  Bottom Layer w15: 521,715.53 ccw(c560.57,715.53) C6.2@532.59,687.55 ; 521,751.75 ccw(c596.79,751.75) C6.2@543.2,698.16 ; v1@540,795 cw(c515.86,795) 532.93,777.93 cw(c550,760.86) v1@550,785 ; C6.2@545,688.15 521,712.15 521,766 v1(550,795)
NetC15_2: C15.2 R1.1 R10.1 U4.3 | length 1424.4
  Top Layer w20: U4.3@520,2845.51 520,2910 555,2945 v1(655,2945) ; v1@649.7,2939.7 ccw(c636.89,2926.89) 636.89,2945 ccw(c636.89,2963.11) v1@649.7,2950.3
  Bottom Layer w20: C15.2@644.39,2325.61 ccw(c570.5,2399.5) 675,2399.5 ; R10.1@644.39,2934.39 cw(c582.57,2872.57) 670,2872.57 ; R10.1@649.7,2939.7 cw(c600.68,2890.68) 670,2890.68 ; C15.2@655,2310 675,2330 675,2500 ; v1(655,2945) 670,2930 670,2505 ; C15.2@658.54,2311.46 ccw(c618.79,2351.21) 675,2351.21 ; R10.1@658.54,2948.54 cw(c630.86,2920.86) R10.1@670,2920.86 ; R1.1@659.39,2480.61 ccw(c633.79,2506.21) 670,2506.21 ccw(c706.21,2506.21) R1.1@680.61,2480.61 ; R1.1@659.66,2480.86 ccw(c636.67,2505) 670,2505 ; R1.1@664.39,2459.39 cw(c638.79,2433.79) 675,2433.79 cw(c711.21,2433.79) R1.1@685.61,2459.39 ; R1.1@666,2482 ccw(c652.5,2500) 675,2500 ; 670.11,2504.89 cw(c648.77,2483.54) R1.1@674.22,2467.31 ; R1.1@680.34,2480.86 cw(c703.33,2505) 670,2505 ; R1.1@684,2482 cw(c697.5,2500) 675,2500 ; 670,2505 675,2500
NetC16_2: C16.2 R2.1 R11.1 U4.5 | length 1279.4
  Top Layer w15: C16.2@435.96,2569.98 ccw(c426.3,2586) v1(445,2586) ; C16.2@437.93,2578.93 cw(c420.86,2561.86) 445,2561.86 cw(c469.14,2561.86) C16.2@452.07,2578.93 ; C16.2@454.04,2569.98 cw(c463.7,2586) v1(445,2586) ; C16.2@456,2550 C16.2@445,2550 v1(445,2586) ; C16.2@456,2555 R11.1@610,2555 610,2576 v1(620,2586) ; C16.2@457.37,2542.63 cw(c487.25,2512.75) 487.25,2555 cw(c487.25,2597.25) C16.2@457.37,2567.37 ; R11.1@597.63,2542.63 ccw(c567.75,2512.75) 567.75,2555 ccw(c567.75,2597.25) R11.1@597.63,2567.37 ; R11.1@610,2553.43 cw(c636.52,2553.43) R11.1@624.52,2577.08 ; v1@612.93,2802.07 ccw(c595.86,2819.14) 620,2819.14 ccw(c644.14,2819.14) v1@627.07,2802.07 ; v1(620,2795) U4.5@620,2845.51
  Bottom Layer w15: R2.1@432.63,2277.37 ccw(c402.75,2307.25) 445,2307.25 ccw(c487.25,2307.25) R2.1@457.37,2277.37 ; v1@437.93,2578.93 cw(c420.86,2561.86) 445,2561.86 cw(c469.14,2561.86) v1@452.07,2578.93 ; R2.1@445,2260 v1(445,2586) v1@446,2585 ; v1@612.93,2593.07 ccw(c595.86,2610.14) 620,2610.14 ccw(c644.14,2610.14) v1@627.07,2593.07 ; v1@612.93,2787.93 cw(c595.86,2770.86) 620,2770.86 cw(c644.14,2770.86) v1@627.07,2787.93 ; v1(620,2586) v1(620,2795)
NetC17_2: C17.2 R3.1 R12.1 U4.7 | length 1196.1
  Top Layer w20: R12.1@169.39,2749.39 cw(c143.79,2723.79) 180,2723.79 cw(c216.21,2723.79) R12.1@190.61,2749.39 ; R12.1@180,2760 180,2719 C17.2@287,2612 ; 211.82,2687.18 cw(c119.63,2595) C17.2@250,2595 ; 236.35,2662.65 ccw(c285,2711.31) v1@285,2642.5 ; 245.96,2653.04 cw(c187.92,2595) C17.2@270,2595 ; C17.2@280.1,2618.9 cw(c256.2,2595) C17.2@290,2595
  Top Layer w23.62: C17.2@280.3,2617.7 ccw(c284.87,2634.51) 297.19,2622.19 ; v1@286.49,2640.49 ccw(c297.18,2679.81) 326,2651 ; C17.2@287,2612 326,2651 ; C17.2@288.19,2595 cw(c332.1,2595) 301.05,2626.05 ; U4.7@720,2845.51 720,2719 652,2651 326,2651
  other v1: 285,2635
NetCON1_1: CON1.1 R7.1 U2.26 | length 1800.7
  Top Layer w15: CON1.1@1560,980 1630,980 1665,945 1770,945 1795,970 R7.1@1795,980 2070,980 v1(2105,1015) ; CON1.1@1575.58,964.42 cw(c1613.18,926.82) 1613.18,980 cw(c1613.18,1033.18) CON1.1@1575.58,995.58 ; 1680.32,945 ccw(c1680.32,1089.68) R7.1@1782.63,987.37 ; 1716.54,945 ccw(c1716.54,1053.46) R7.1@1793.23,976.77 ; 1752.75,945 ccw(c1752.75,1017.25) R7.1@1803.84,966.16 ; 1772.5,947.5 ccw(c1756.43,963.57) R7.1@1778.22,970.03 ; 1773.66,948.66 cw(c1795,927.32) R7.1@1795,957.5 ; R7.1@1807.37,967.63 cw(c1837.25,937.75) 1837.25,980 cw(c1837.25,1022.25) R7.1@1807.37,992.37 ; U2.26@1902.44,1497.01 2067.01,1497.01 v2(2070,1494.02) ; 2054.33,1497.01 cw(c2054.33,1478.34) v2@2067.53,1491.54 ; v1@2095,1015 cw(c2070.86,1015) 2087.93,997.93 cw(c2105,980.86) v1@2105,1005
  Bottom Layer w15: v2(2070,1494.02) 2105,1459.02 v1(2105,1015) ; v1@2097.93,1022.07 ccw(c2080.86,1039.14) 2105,1039.14 ccw(c2129.14,1039.14) v1@2112.07,1022.07
NetCON1_3: CON1.3 U2.32 | length 1260.3
  Top Layer w15: v1(1620,1660) 1710,1660 1735.98,1685.98 U2.32@1902.44,1685.98 ; v1@1627.07,1652.93 cw(c1644.14,1635.86) 1644.14,1660 cw(c1644.14,1684.14) v1@1627.07,1667.07
  Bottom Layer w15: CON1.3@1460,980 1487,1007 1487,1231 1411,1307 1411,1591 1480,1660 v1(1620,1660) ; v1@1612.93,1652.93 ccw(c1595.86,1635.86) 1595.86,1660 ccw(c1595.86,1684.14) v1@1612.93,1667.07
NetCON1_5: CON1.5 R6.2 U2.7 | length 1564.7
  Top Layer w15: 1342,1004.21 ccw(c1384.21,1004.21) CON1.5@1354.36,974.36 ; 1342,1040.42 ccw(c1420.42,1040.42) CON1.5@1364.97,984.97 ; 1342,1076.63 ccw(c1456.63,1076.63) CON1.5@1375.58,995.58 ; CON1.5@1360,1002.03 ccw(c1360,1031.06) 1380.53,1010.53 ; CON1.5@1367.03,980 cw(c1408.14,980) 1379.07,1009.07 ; CON1.5@1382.03,980 cw(c1459.35,980) 1404.67,1034.67 ; 1426.59,1191.59 ccw(c1388.18,1230) R6.2@1442.5,1230 ; 1438.66,1203.66 cw(c1460,1182.32) R6.2@1460,1212.5 ; U2.7@1457.56,1528.5 1536.5,1528.5 v1(1554,1511) ; R6.2@1465,1230 1410,1175 1371,1175 1342,1146 1342,998 CON1.5@1360,980 1360,990 1465,1095 v1@1571,1095 ; 1544.03,1095 cw(c1544.03,1064.03) v1@1565.93,1085.93 ; 1553.69,1095 ccw(c1553.69,1112.31) v1@1565.93,1100.07
  Bottom Layer w15: v1@1546.93,1503.93 cw(c1527.44,1484.44) 1555,1484.44 ; v1(1554,1511) v1@1554,1514 ; 1555,1489.27 cw(c1575.73,1489.27) v1@1561.07,1503.93 ; v1@1555,1505 1555,1111 v1(1573,1093)
NetCON1_9: CON1.9 U2.1 | length 1250.2
  Top Layer w15: CON1.9@1140,980 CON1.9@1160,980 ; v1(1165,1700) 1218,1753 1387,1753 1422.52,1717.48 U2.1@1457.56,1717.48 ; v1@1165,1710 ccw(c1165,1734.14) 1182.07,1717.07 ccw(c1199.14,1700) v1@1175,1700 ; 1408.77,1731.23 ccw(c1433.94,1756.4) U2.1@1433.94,1720.81
  Bottom Layer w15: CON1.9@1144.42,995.58 ccw(c1101.99,1038.01) 1162,1038.01 ; CON1.9@1162,981 1162,1685 v1@1165,1689 ; 1162,1028.35 ccw(c1208.35,1028.35) CON1.9@1175.58,995.58 ; 1162,1668.62 cw(c1196.38,1668.62) v1@1172.07,1692.93 ; v1(1165,1700) v1@1176,1689
NetL1_2: L1.2 XS1.1 | length 214
  Bottom Layer w45: L1.2@100,390 100,505 XS1.1@170,575
NetL2_2: L2.2 XS2.1 | length 206.8
  Top Layer w15: L2.2@165,1740 L2.2@167,1742
  Top Layer w50: L2.2@167,1742 XS2.1@167,1946
Netled1_a: led1.a led2.a led3.a led4.a led5.a U1.27 | length 4512.1
  Top Layer w15: led5.a@1517.57,3006.59 cw(c1479.97,2968.99) 1533.15,2968.99 cw(c1586.33,2968.99) led5.a@1548.73,3006.59 ; led5.a@1533.15,3022.17 1533.15,2941.85 1610,2865 v1@2549.45,2865 ; led4.a@2027.57,3006.59 cw(c1989.97,2968.99) 2043.15,2968.99 cw(c2096.33,2968.99) led4.a@2058.73,3006.59 ; led4.a@2043.15,3022.17 2043.15,2873.7 2050,2866.85 ; 2518.79,2865 cw(c2518.79,2823.79) v1@2547.93,2852.93 ; led3.a@2537.57,3006.59 cw(c2499.97,2968.99) 2553.15,2968.99 cw(c2606.33,2968.99) led3.a@2568.73,3006.59 ; v1@2547.93,2867.07 ccw(c2535.33,2879.67) 2553.15,2879.67 ; v1@2549.72,2865.28 v1@2553.15,2868.7 ; 2553.15,2888.61 ccw(c2583.61,2888.61) v1@2562.07,2867.07 ; led3.a@2553.15,3022.17 v1@2553.15,2868.7 ; v1@2562.07,2852.93 cw(c2595.68,2819.32) 2595.68,2866.85 ; U1.27@2567.17,1820 v1(2625,1820) ; v1@2617.93,1812.93 ccw(c2600.86,1795.86) 2600.86,1820 ccw(c2600.86,1844.14) v1@2617.93,1827.07 ; led2.a@3047.57,3006.59 cw(c3009.97,2968.99) 3063.15,2968.99 cw(c3116.33,2968.99) led2.a@3078.73,3006.59 ; led2.a@3063.15,3022.17 3063.15,2866.85 ; led1.a@3557.57,3006.59 cw(c3519.97,2968.99) 3573.15,2968.99 cw(c3626.33,2968.99) led1.a@3588.73,3006.59 ; led1.a@3573.15,3022.17 3573.15,2953.15 3485,2865 3065,2865 3063.15,2866.85 ; v1@2553.15,2868.7 2555,2866.85 3063.15,2866.85
  Bottom Layer w10: v1@2546.16,2851.16 cw(c2524.82,2829.82) 2555,2829.82 cw(c2585.18,2829.82) v1@2563.84,2851.16 ; v1(2555,2860) 2555,2735 2605,2685 2605,1942 2625,1922 v1(2625,1820) ; v1@2616.16,1828.84 ccw(c2594.82,1850.18) 2625,1850.18 ccw(c2655.18,1850.18) v1@2633.84,1828.84
Netled1_AT: led1.AT U1.15 | length 2780.1
  Top Layer w15: U1.15@2567.17,1220 v1(3065,1220) ; v1@3057.93,1212.93 ccw(c3040.86,1195.86) 3040.86,1220 ccw(c3040.86,1244.14) v1@3057.93,1227.07
  Bottom Layer w15: v1(3065,1220) 3126,1281 3126,1813 3473.15,2160.15 led1.AT@3473.15,2422.17 led1.AT@3473.15,3022.17 ; v1@3065,1230 ccw(c3065,1254.14) 3082.07,1237.07 ccw(c3099.14,1220) v1@3075,1220 ; led1.AT@3457.57,3006.59 cw(c3419.97,2968.99) 3473.15,2968.99 cw(c3526.33,2968.99) led1.AT@3488.73,3006.59 ; led1.AT@3459.01,2408.02 cw(c3424.87,2373.88) 3473.15,2373.88 cw(c3521.43,2373.88) led1.AT@3487.29,2408.02 ; led1.AT@3459.01,2436.31 ccw(c3424.87,2470.45) 3473.15,2470.45 ccw(c3521.43,2470.45) led1.AT@3487.29,2436.31
Netled1_b: led1.b led2.b led3.b led4.b led5.b U1.3 | length 4891.2
  Top Layer w10: v1@1576.16,2273.84 ccw(c1554.82,2295.18) 1585,2295.18 ccw(c1615.18,2295.18) v1@1593.84,2273.84 ; v1@1576.16,2506.16 cw(c1554.82,2484.82) 1585,2484.82 cw(c1615.18,2484.82) v1@1593.84,2506.16 ; v1(1585,2265) v1(1585,2515)
  Top Layer w15: led5.b@1633.15,3022.17 1633.15,3038.15 1695,3100 2145,3100 ; led5.b@1640.18,3022.17 cw(c1695.73,3022.17) 1656.45,3061.45 ; led5.b@1655.18,3022.17 cw(c1746.95,3022.17) 1682.06,3087.06 ; v1(1930,1775) 2207.83,1775 U1.3@2212.83,1770 ; v1@1937.07,1767.93 cw(c1954.14,1750.86) 1954.14,1775 cw(c1954.14,1799.14) v1@1937.07,1782.07 ; led4.b@2127.57,3037.74 ccw(c2085.5,3079.81) 2145,3079.81 ; led4.b@2143.15,3022.17 2145,3024.02 2145,3100 ; 2145,3070.88 ccw(c2191.86,3070.88) led4.b@2158.73,3037.74 ; 2162.8,1775 cw(c2162.8,1747.52) U1.3@2182.23,1766.95 ; led3.b@2637.57,3037.74 ccw(c2595.5,3079.81) 2655,3079.81 ; led3.b@2653.15,3022.17 2655,3024.02 2655,3100 ; 2655,3070.88 ccw(c2701.86,3070.88) led3.b@2668.73,3037.74 ; led2.b@3147.57,3037.74 ccw(c3117.57,3067.74) 3160,3067.74 ; 3160,3082.95 ccw(c3223.93,3082.95) led2.b@3178.73,3037.74 ; led2.b@3163.15,3022.17 3160,3025.31 3160,3100 ; 3640.16,3084.84 cw(c3577.49,3022.17) led1.b@3666.12,3022.17 ; 3665.77,3059.23 cw(c3628.7,3022.17) led1.b@3681.12,3022.17 ; led1.b@3673.15,3022.17 3673.15,3051.85 3625,3100 3160,3100 ; 2145,3100 2655,3100 ; 2655,3100 3160,3100
  Bottom Layer w15: v1@1577.93,2257.93 cw(c1560.86,2240.86) 1585,2240.86 cw(c1609.14,2240.86) v1@1592.07,2257.93 ; v1(1585,2265) 1585,2205 1705,2085 1705,2000 v1(1930,1775) ; v1(1585,2515) 1633.15,2563.15 led5.b@1633.15,3022.17 ; v1@1585,2525 ccw(c1585,2549.14) 1602.07,2532.07 ccw(c1619.14,2515) v1@1595,2515 ; led5.b@1617.57,3006.59 cw(c1579.97,2968.99) 1633.15,2968.99 cw(c1686.33,2968.99) led5.b@1648.73,3006.59 ; v1@1920,1775 ccw(c1895.86,1775) 1912.93,1792.07 ccw(c1930,1809.14) v1@1930,1785